# Altium PCB WE_1100R3.PcbDoc
Units mm, origin at the board's own origin, x right, y up, seen from the top; angles counter-clockwise.
Board outline 39.6 x 20 mm, 4 copper layers (Top Side, Ref Ground TS, Ref Ground BS, Bottom Side), stack 0.736 mm thick; 21 components, 29 nets, 127 pads, 112 vias.
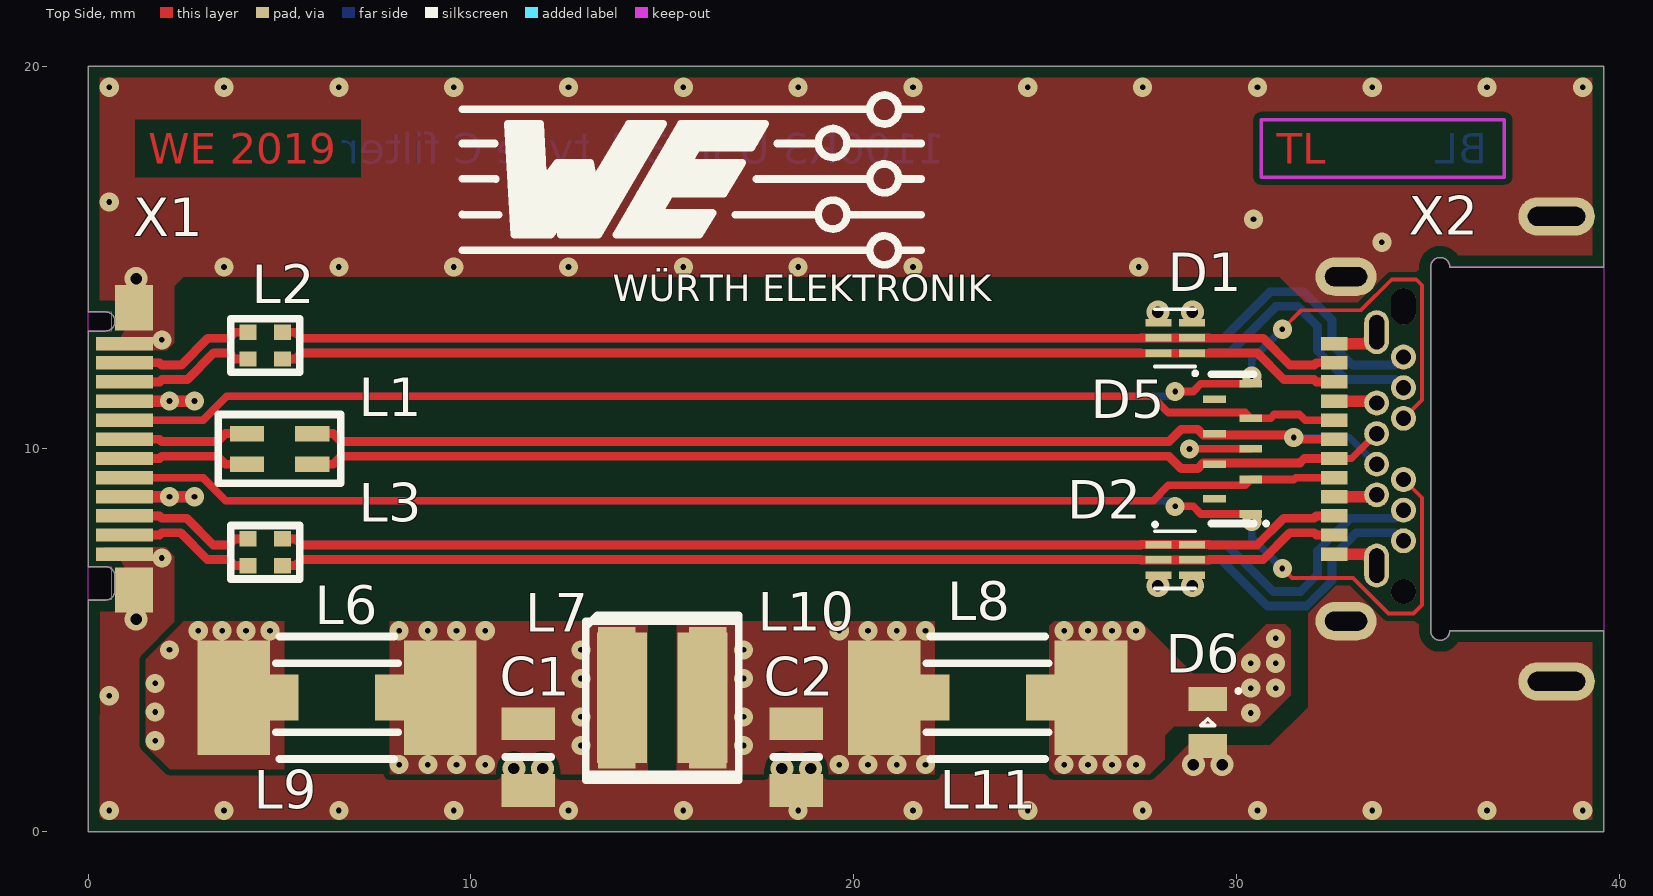
[diagram p0: Top Side view]
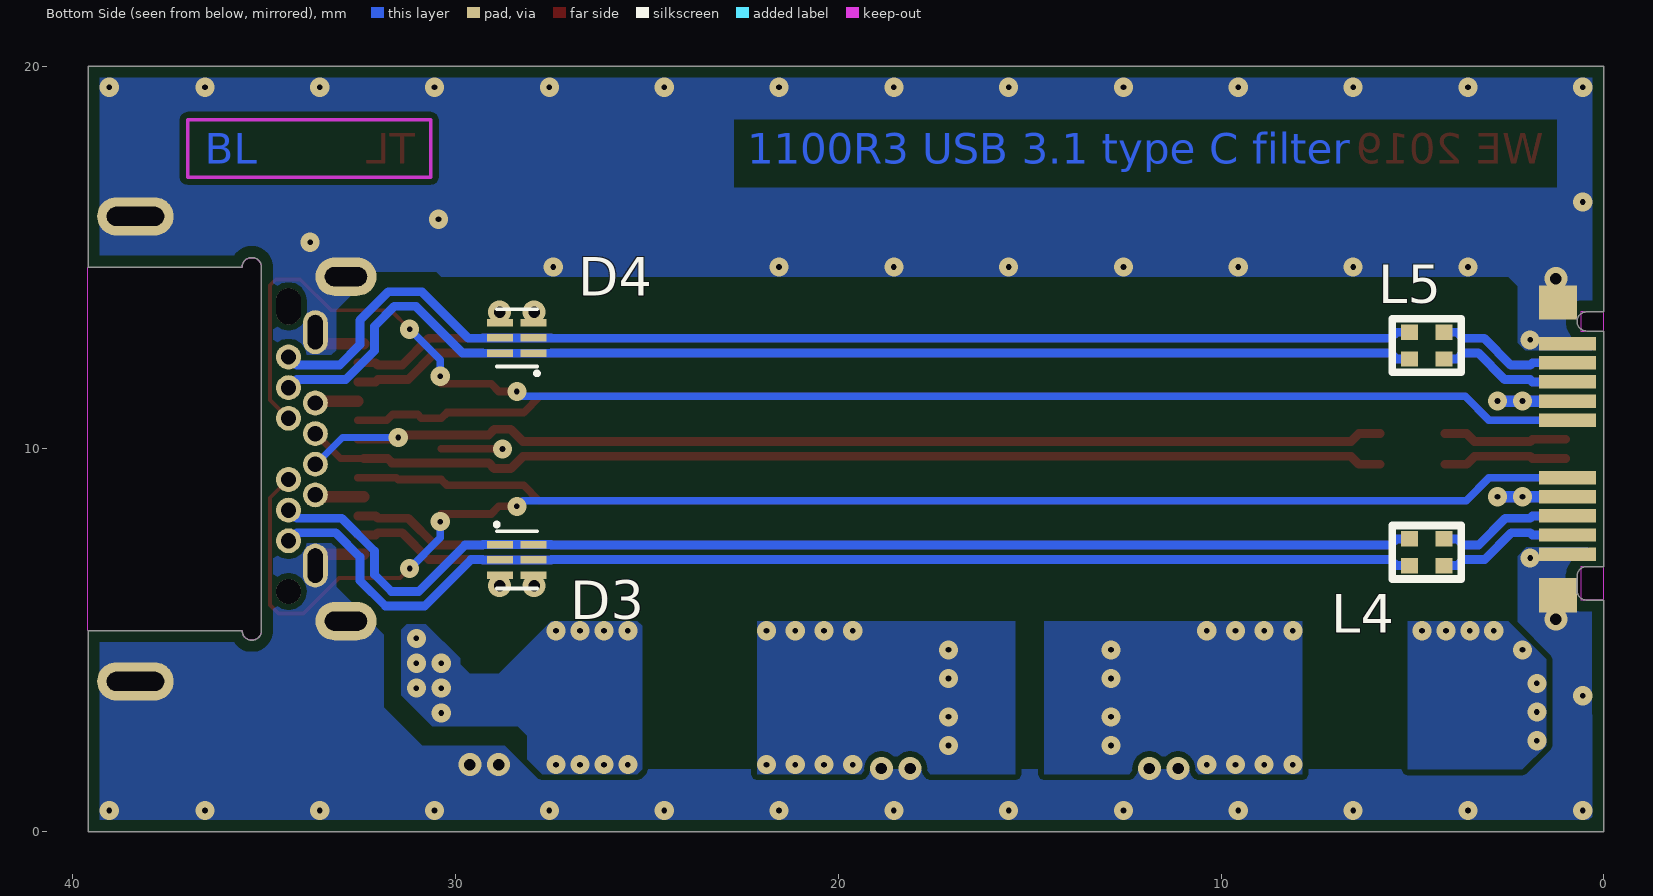
[diagram p1: Bottom Side view, seen from below]
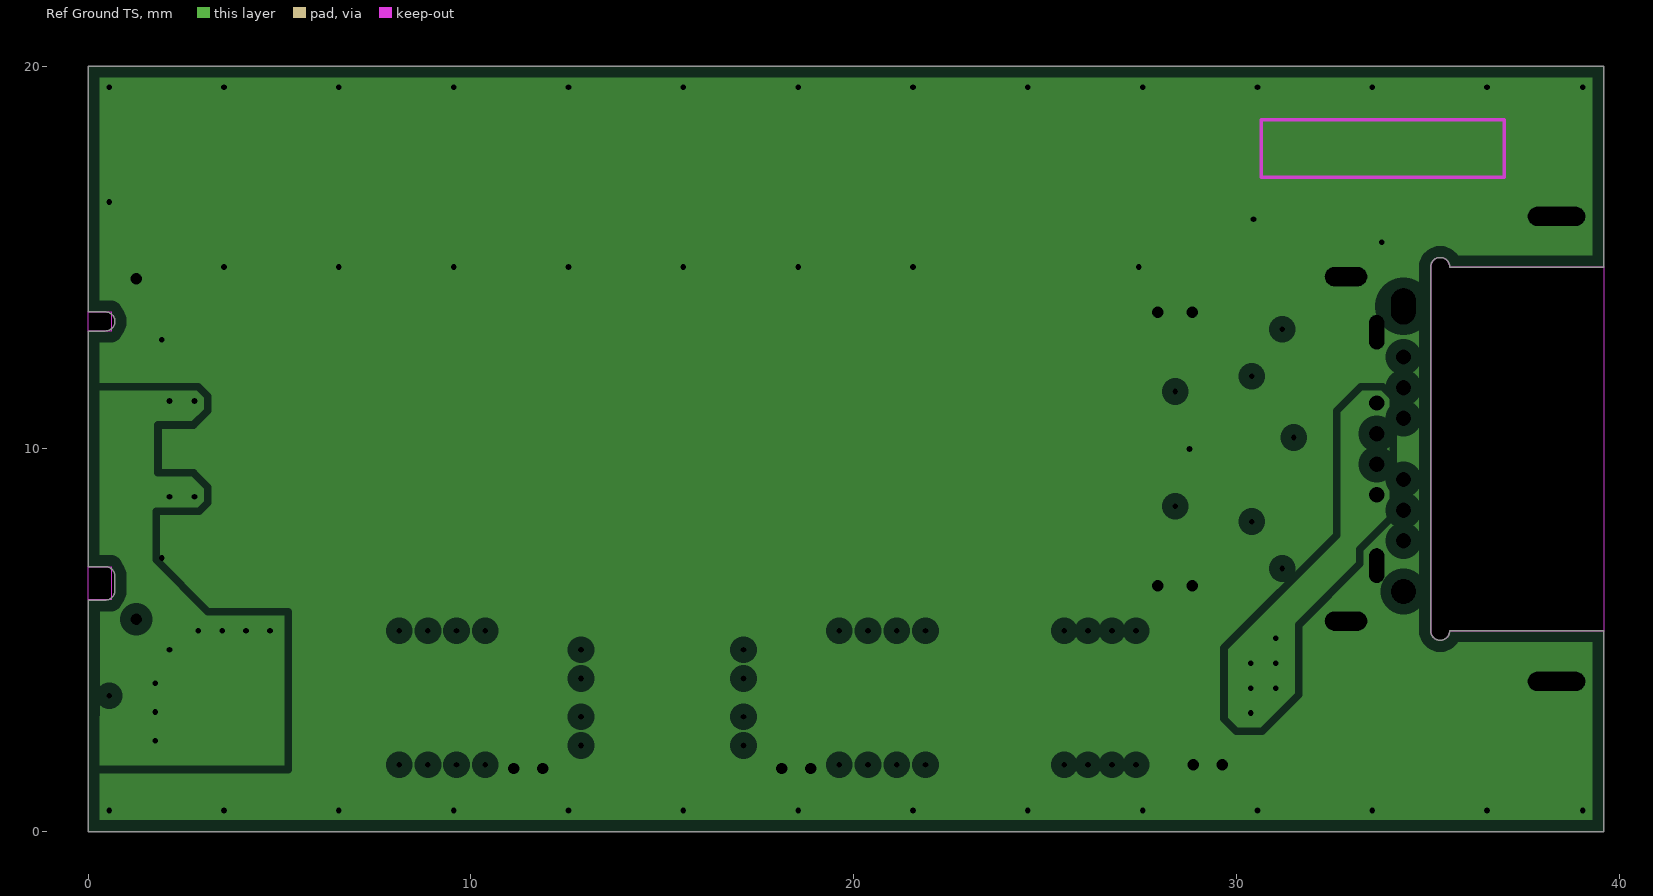
[diagram p2: Ref Ground TS, clearances drawn from the general rule]
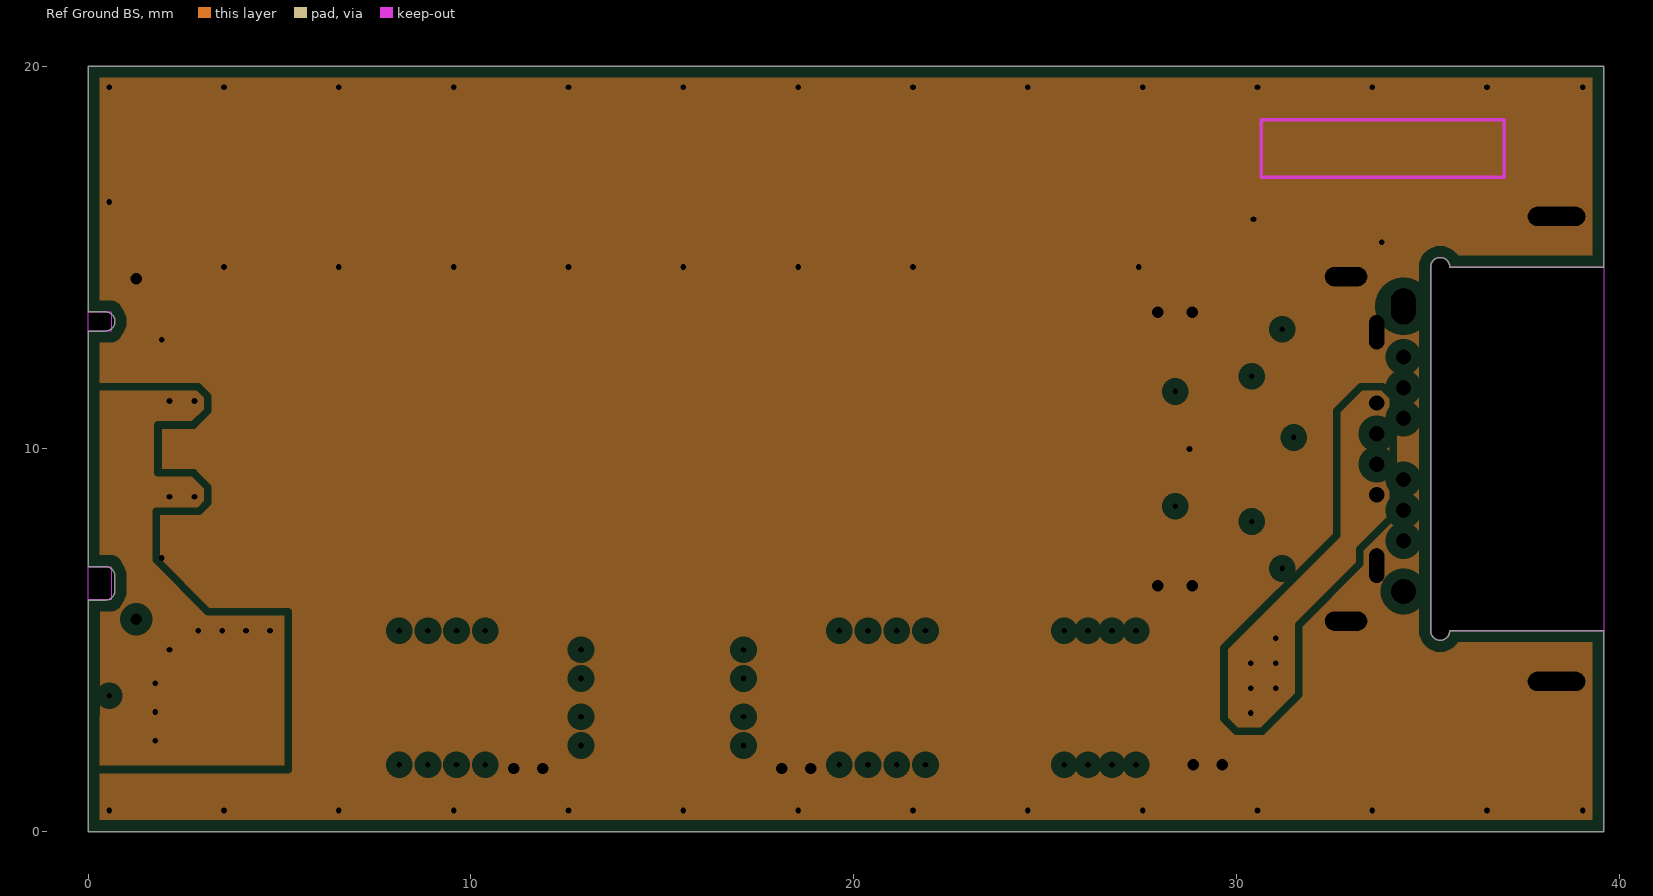
[diagram p3: Ref Ground BS, clearances drawn from the general rule]
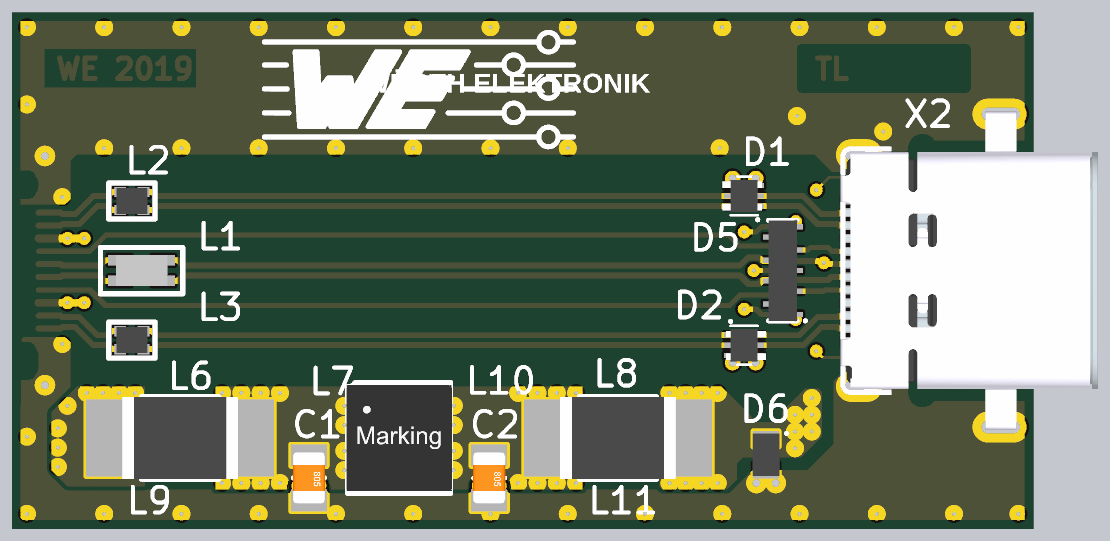
[diagram p4: 3D render of the assembled board from above, using the file's embedded part models]
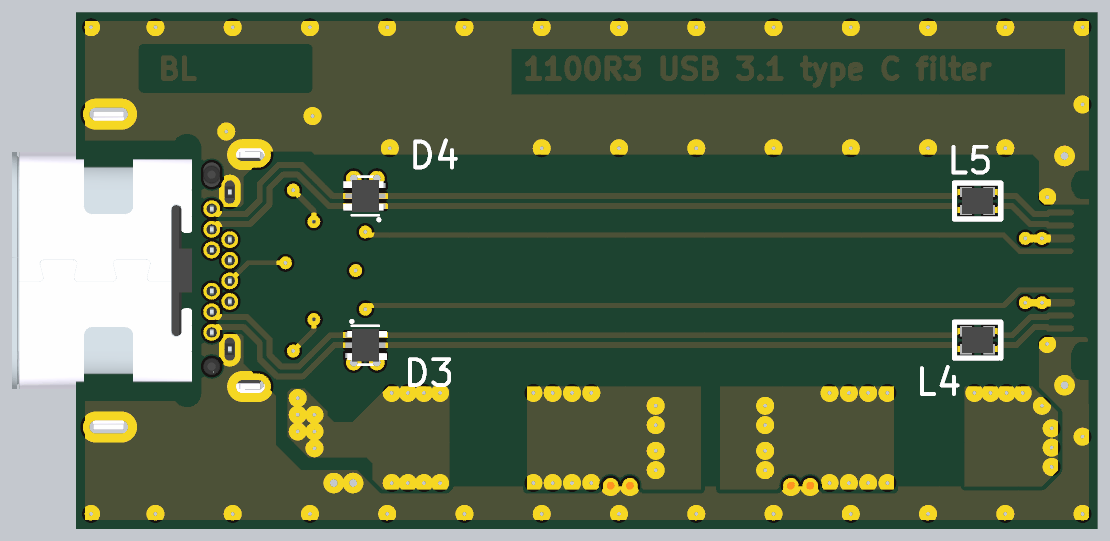
[diagram p5: 3D render of the assembled board from below, using the file's embedded part models]

## Layer stack, top to bottom
Top Solder: solder mask 0.03, Solder Resist, Dk 3.5
Top Side: signal copper 0.04
Dielectric 1: prepreg 0.17, FR-4 1080 2116 TG135, Dk 4
Ref Ground TS: plane copper 0.033, net (Multiple Nets)
Dielectric 3: core 0.25, FR-4, Dk 4.1
Ref Ground BS: plane copper 0.033, net (Multiple Nets)
Dielectric 4: prepreg 0.17, FR-4 1080 2116 TG135, Dk 4
Bottom Side: signal copper 0.04
Bottom Solder: solder mask 0.03, Solder Resist, Dk 3.5

## Board outline
0.005,6.05 0.45,6.05 ccw(c0.45,6.3) 0.7,6.3 0.7,6.675 ccw(c0.45,6.675) 0.45,6.925 0,6.925 0,13.08 0.45,13.08 ccw(c0.45,13.33) 0.45,13.58 0,13.58 0,20 39.6,20 39.6,14.75 35.576,14.75 ccw(c35.325,14.75) 35.074,14.75 35.075,14.75 35.075,5.25 ccw(c35.325,5.25) 35.575,5.25 39.6,5.25 39.6,0 0,0

## Design rules (kind name [scope] priority, off if disabled: settings)
BoardOutlineClearance [All] p1: gap=0.3 ignorepadtopadclearanceinfootprint=FALSE except(0.1: Track-CutoutEdge)
Clearance Clearance-xPP-xTP-xTT [All] p1: gap=0.15 ignorepadtopadclearanceinfootprint=FALSE except(0: Arc-Hole Track-Hole SMDPad-Hole THPad-Hole Via-Hole Fill-Hole Poly-Hole Region-Hole Text-Hole; 0.1: Track-Track Track-SMDPad Track-THPad Track-Via Track-Text SMDPad-Poly SMDPad-Region THPad-THPad)
ComponentClearance FilterClearance [InComponentClass('Filter') vs InComponentClass('Filter')] p1: gap=0 collisioncheckmode=3 verticalgap=0 showdistances=FALSE
ComponentClearance [All] p2: gap=0.25 collisioncheckmode=3 verticalgap=0.25 showdistances=FALSE
DiffPairsRouting [All] p1: maxlimit=0.25 minlimit=0.15 mostfreqgap=0.15 toplayer_minwidth=0.15 toplayer_maxwidth=0.3 toplayer_prefwidth=0.23 bottomlayer_minwidth=0.15 bottomlayer_maxwidth=0.3 bottomlayer_prefwidth=0.23 maxuncoupledlength=12.5
Height [All] p1: minheight=0 maxheight=25 prefheight=12.5
HoleSize HoleSize-PTH [All] p1: absolutevalues=TRUE maxlimit=2 minlimit=0.1 maxpercent=80.000 minpercent=20.000
HoleToHoleClearance [All] p1: gap=0.15 allowstackedmicrovias=TRUE
MinimumAnnularRing "Minimum IAR  >0.45mm" [((ObjectKind = 'Pad') OR (ObjectKind = 'Via')) And (Layer = 'MultiLayer') And (HoleDiameter > AsMM(0.45))] p1: minimumring=0.1 // minimum inner annular ring for pads > 0.45mm finished hole size
MinimumAnnularRing "Minimum IAR <=0.45mm" [((ObjectKind = 'Pad') OR (ObjectKind = 'Via')) And (Layer = 'MultiLayer') And (HoleDiameter <= AsMM(0.45))] p2: minimumring=0.1 // minimum inner annular ring for pads <= 0.45mm finished hole size
MinimumSolderMaskSliver [All] p1 off: minsoldermaskwidth=0.1
PlaneClearance PlaneClearance-IPI [All] p1: clearance=0.275
PlaneConnect [All] p1: planeconnectstyle=Direct reliefexpansion=0.4 reliefentries=4 reliefconductorwidth=0.2 reliefairgap=0.2
PolygonConnect PolygonConnect-xTW [All] p1: connectstyle=Direct reliefconductorwidth=0.2 reliefentries=4 polygonreliefangle="90 Angle" airgapwidth=0.254
RoomDefinition WE_1100_top [InComponentClass('WE_1100_top')] p1: confinementstyle=ConfineIn formatcopy=TRUE lockcomponents=FALSE outline -12.3,-0.4 44.575,-0.4 44.575,20.4 -12.3,20.4
RoutingCorners [All] p1: cornerstyle=45-Degree minsetback=2.5 maxsetback=2.5
RoutingVias "RoutingVias > 0.45mm" [(ObjectKind = 'Via') And (HoleDiameter > AsMM(0.45))] p1: holewidth=0.15 width=0.5 viastyle="Through Hole" minholewidth=0.1 minwidth=0.45 maxholewidth=0.25 maxwidth=0.6 // finishet hole size > 0.45mm
RoutingVias "RoutingVias <= 0.45mm" [(ObjectKind = 'Via') And (HoleDiameter <= AsMM(0.45))] p2: holewidth=0.15 width=0.5 viastyle="Through Hole" minholewidth=0.1 minwidth=0.45 maxholewidth=0.25 maxwidth=0.6 // finishet hole size <= 0.45mm
SilkToSilkClearance [All] p1 off: silktosilkclearance=0.2
SilkToSolderMaskClearance SilkscreenOverComponentPads [IsPad] p1 off: minsilkscreentomaskgap=0.1 clearancetoexposedcopper=FALSE
SolderMaskExpansion [All] p1: expansion=0.1
UnpouredPolygon [All] p1: allowshelved=TRUE
Width Width-xTW [All] p1: maxlimit=1.5 minlimit=0.1 preferedwidth=0.2
18 further rules are at their usual default settings.

## Classes and differential pairs
differential pair SSTX2H: +SSTX2H_P -SSTX2H_N
differential pair SSTX2D: +SSTX2D_P -SSTX2D_N
differential pair SSTX1H: +SSTX1H_P -SSTX1H_N
differential pair SSTX1D: +SSTX1D_P -SSTX1D_N
differential pair SSRX2H: +SSRX2H_P -SSRX2H_N
differential pair SSRX2D: +SSRX2D_P -SSRX2D_N
differential pair SSRX1H: +SSRX1H_P -SSRX1H_N
differential pair SSRX1D: +SSRX1D_P -SSRX1D_N
differential pair D1D: +D1D_P -D1D_N
differential pair D1H: +D1H_P -D1H_N

## Components (designator, comment, footprint, x,y, rotation, side; value= is the part's Value field where it differs from the comment)
C1 "4u7F/25V" "C0805 (reflow)" 11.5,1.95 r270 top value=4.7u
C2 "4u7F/25V" "C0805 (reflow)" 18.5,1.95 r270 top value=4.7u
D1 "WE-TVS-super-speed" DFN88P100X50-6L 28.4,12.9 r180 top
D2 "WE-TVS-super-speed" DFN88P100X50-6L 28.4,7.1 r0 top
D3 "WE-TVS-super-speed" DFN88P100X50-6L 28.4,7.1 r180 bottom
D4 "WE-TVS-super-speed" DFN88P100X50-6L 28.4,12.9 r0 bottom
D5 "WE-TVS-super-speed" DFN90P380X55-9L 29.9,10 r90 top
D6 "WE-TVS-Standard" DFN110P160X55-2L 29.25,2.85 r270 top
L1 "90R/0.37A" "WE-CNSW-0805 (REFLOW)" 5,10 r0 top value=90R
L2 "60R/0.6A" "WE-CNSW-HF-0504 (REFLOW)" 4.625,12.7 r0 top value=60R
L3 "60R/0.6A" "WE-CNSW-HF-0504 (REFLOW)" 4.625,7.3 r0 top value=60R
L4 "60R/0.6A" "WE-CNSW-HF-0504 (REFLOW)" 4.625,7.3 r0 bottom value=60R
L5 "60R/0.6A" "WE-CNSW-HF-0504 (REFLOW)" 4.625,12.7 r0 bottom value=60R
L6 "100R/8000mA" WE-MPSB_1812 6.5,3.5 r0 top value=100R
L7 "1.2uH" WE-MAPI_4020 15,3.5 r0 top value=1u2
L8 "100R/8000mA" WE-MPSB_1812 23.5,3.5 r0 top value=100R
L9 "110R/5400mA" WE-MPSB_1206 6.5,3.5 r0 top value=110R
L10 "1.2uH" WE-MAPI_3020 15,3.5 r0 top value=1u2
L11 "110R/5400mA" WE-MPSB_1206 23.5,3.5 r0 top value=110R
X1 "USB 3.1 C 0.8" 632712000011 -5.85,10 r270 top
X2 "BU-24 USB 3.1 C1.6 mid mount" 632723130112 37.125,10 r90 top value="mid mount"

## Footprints (in the part's own frame and the unit in brackets; to place one, negate y for a bottom-side part, rotate by r counter-clockwise, add the part's x,y. Pads: shape width x height; smd on the part's side, far side on the other; paste and mask are expansions set on the pad)
632712000011 [mm] "USB 3.1 Type C Plug Horizontal SMT"
  rect 0.35x1.5 smd: A1(2.75,6.8) A2(2.25,6.8) A3(1.75,6.8) A4(1.25,6.8) A5(0.75,6.8) A6(0.25,6.8) A7(-0.25,6.8) A8(-0.75,6.8) A9(-1.25,6.8) A10(-1.75,6.8) A11(-2.25,6.8) A12(-2.75,6.8)
  rect 0.35x1.5 smd far side: B1(-2.75,6.8) B2(-2.25,6.8) B3(-1.75,6.8) B4(-1.25,6.8) B5(-0.75,6.8) B8(0.75,6.8) B9(1.25,6.8) B10(1.75,6.8) B11(2.25,6.8) B12(2.75,6.8)
  rect 0.9x1 smd far side: Shell(-3.825,7.05) Shell(3.825,7.05)
  rect 1.18x1 smd: Shell(-3.69,7.05) Shell(3.69,7.05)
  Keep-Out Layer board cut-out: -3.58,5.85 -3.58,6.45 -3.08,6.45 -3.08,5.85
  Keep-Out Layer board cut-out: 3.075,5.85 3.075,6.45 3.945,6.45 3.945,5.85
  body extent -5.13,-5.92 5.12,7.48, height 1.74
632723130112 [mm] "USB_Type C 3.1_Mid-Mount_THR/SMT_1,6mm"
  rect 0.35x0.7 smd: A1(-2.75,4.57) A2(-2.25,4.57) A3(-1.75,4.57) A4(-1.25,4.57) A5(-0.75,4.57) A6(-0.25,4.57) A7(0.25,4.57) A8(0.75,4.57) A9(1.25,4.57) A10(1.75,4.57) A11(2.25,4.57) A12(2.75,4.57)
  oval 1.15x0.65 hole 0.4 slot 0.9 at 0 deg: B1(3.05,3.46) B12(-3.05,3.46)
  round 0.65 hole 0.4: B2(2.4,2.76) B3(1.6,2.76) B4(1.2,3.46) B5(0.8,2.76) B6(0.4,3.46) B7(-0.4,3.46) B8(-0.8,2.76) B9(-1.2,3.46) B10(-1.6,2.76) B11(-2.4,2.76)
  round 0.65 hole 0.65 unplated: M1(-3.725,2.76)
  oval 0.95x0.65 hole 0.65 slot 0.95 at 0 deg unplated: M2(3.725,2.76)
  oval 1x2 hole 0.5 slot 1.5 at 90 deg: Shell(-6.075,-1.24) Shell(6.075,-1.24)
  oval 1x1.6 hole 0.5 slot 1.1 at 90 deg: Shell(-4.5,4.26) Shell(4.5,4.26)
  Keep-Out Layer board cut-out: -4.75,-2.49 4.75,-2.49 4.75,1.55 4.858,1.575 4.945,1.644 4.994,1.744 4.994,1.856 4.945,1.956 4.858,2.025 4.75,2.05 4.75,2.05 -4.75,2.05 -4.858,2.025 -4.945,1.956 -4.994,1.856 -4.994,1.744 -4.945,1.644 -4.858,1.575 -4.75,1.55 -4.75,1.55
  body extent -6.18,-5 6.18,4.99, height 2.04
"C0805 (reflow)" [mm] "Multilayer Ceramic Chip Capacitors"
  rect 0.85x1.4 smd: 1(-0.875,0) 2(0.875,0)
  silkscreen extent 0,-0.6 0,0.6, body extent -1,-0.63 1,0.63, height 0.78
DFN88P100X50-6L [mm] "DFN, 6-Leads, Body 1,20x1,00mm, Pitch 0,875mm, IPC High Density"
  rect 0.675x0.2 smd: 1(-0.437,0.4) 2(-0.437,0) 3(-0.437,-0.4) 4(0.437,-0.4) 5(0.437,0) 6(0.437,0.4)
  silkscreen extent -0.58,-0.75 0.53,0.97, body extent -0.7,-0.62 0.85,0.63, height 0.5
DFN90P380X55-9L [mm] "DFN, 9-Leads, Body 1,00x3,80mm, Pitch 0,9mm, IPC High Density"
  rect 0.2x0.6 smd: 1(-1.7,-0.475) 2(-0.8,-0.475) 3(0,-0.475) 4(0.8,-0.475) 5(1.7,-0.475) 6(1.3,0.475) 7(0.4,0.475) 8(-0.4,0.475) 9(-1.3,0.475)
  silkscreen extent -2,-0.92 1.95,0.55, body extent -1.95,-0.55 1.95,0.55, height 0.55
DFN110P160X55-2L [mm] "DFN, 2-Leads, Body 1,00x1,60mm, Pitch 1,10mm, IPC High Density"
  rect 0.625x1 smd: 1(-0.612,0) 2(0.612,0)
  silkscreen extent -0.87,-0.18 0.08,0.85, body extent -0.82,-0.53 0.82,0.53, height 0.55
"WE-CNSW-0805 (REFLOW)" [mm] "SMD Inductor, 4-Leads, Body 1,4x2,2mm"
  rect 0.9x0.4 smd: 1(-0.85,0.4) 2(0.85,0.4) 3(-0.85,-0.4) 4(0.85,-0.4)
  silkscreen extent -1.6,-0.9 1.6,0.9, body extent -1,-0.6 1,0.6, height 1.18
"WE-CNSW-HF-0504 (REFLOW)" [mm] "SMD Inductor, 4-Leads, Body 1.0x1.2mm"
  rect 0.45x0.4 smd: 1(-0.45,0.35) 2(0.45,0.35) 3(-0.45,-0.35) 4(0.45,-0.35)
  silkscreen extent -0.9,-0.7 0.9,0.7, body extent -0.6,-0.5 0.6,0.5, height 0.89
WE-MAPI_3020 [mm] "SMD Shielded Power Inductor, 2-Leads, body 3.0x3.0"
  rect 1.3x3.4 smd: 1(-1.05,0) 2(1.05,0)
  silkscreen extent -2,-2 2,2, body extent -1.5,-1.5 1.5,1.5, height 2.01
WE-MAPI_4020 [mm] "SMD Shielded Power Inductor, 2-Leads, body 4.1x4.1"
  rect 0.98x3.7 smd: 1(-1.185,0) 2(1.185,0)
  silkscreen extent -2,-2.15 2,2.15, body extent -2.05,-2.05 2.05,2.05, height 2.11
WE-MPSB_1206 [mm] "SMD EMI Multilayer Power Suppression Bead, body 3.2x1.6"
  rect 1.6x1.2 smd: 1(-1.8,0) 2(1.8,0)
  silkscreen extent -1.6,-0.9 1.6,0.9, body extent -1.6,-0.8 1.6,0.8, height 1.11
WE-MPSB_1812 [mm] "SMD EMI Multilayer Power Suppression Bead, body 4.5x3.2"
  rect 1.9x3 smd: 1(-2.7,0) 2(2.7,0)
  silkscreen extent -1.5,-1.6 1.5,1.6, body extent -2.25,-1.6 2.25,1.6, height 2.31

## Part data
C1 C2: library part 4UF7/25-X5R-0805, "Ceramic SMT X5R 4,7uF/25V 0805", Case=C0805, Dielectric=X5R, Manufacturer=WE, Temperature="-55°C - +85°C", Tolerance=20%, Voltage=25V, Art.-Code=885012107018, ComponentLink1Description=Datasheet, ComponentLink1URL=http://katalog.we-online.de/pbs/datasheet/885012107018.pdf, Group=C-KERKO, HelpURL=d:\Hardware\Datasheet\Kondensatoren\WCAP-CSGP\885012107018.pdf, Obligation=no, Part-No.=X5R0805475M025DFCT10000, TK=15%, Type=WCAP-CSGP, Value1=4u7F/25V
D1 D2 D3 D4: library part WE-TVS-ULC-DFN1012-6, "TVS, diode, array, 2 channel ESD protection, 3.3V, DFN1012-6", Case=DFN1012, Manufacturer=WE, Voltage=3.3V, Art.-Code=824012823, Group=D-DIODE, HelpURL=d:\Hardware\Datasheet\Diode\WE_824xx_TVS_AZ1023-02F_Preliminary.pdf, MSL=3, Obligation=no, Part-No.=824012823, Preferred Device=no, Type="TVS Diode", Value1=WE-TVS-super-speed
D5: library part WE-TVS-ULC-DFN3810, "TVS, diode, array, 8 channel ESD protection, 1.2V, DFN3810-9", Case=DFN3810, Manufacturer=WE, Voltage=1.2V, Art.-Code=824014885, Group=D-DIODE, HelpURL=d:\Hardware\Datasheet\Diode\WE_824xx_TVS_AZ124S-08F_Preliminary.pdf, MSL=3, Obligation=no, Part-No.=824014885, Preferred Device=no, Type="TVS Diode", Value1=WE-TVS-super-speed
D6: library part WE-TVS20-ULC-DFN1610, "TVS, diode, unidir, ESD protection, 20V, DFN1610", Case=DFN1610, Manufacturer=WE, Voltage=20V, Art.-Code=824045810, ComponentLink1Description=Datasheet, ComponentLink1URL=http://katalog.we-online.de/pbs/datasheet/824045810.pdf, Group=D-DIODE, HelpURL=d:\Hardware\Datasheet\Diode\WE_824xx_TVS_AZ4520-01F_Datasheet.pdf, MSL=3, Obligation=no, Part-No.=824045810, Preferred Device=no, Type="TVS Diode", Value1=WE-TVS-Standard
L1: library part Z90R-370mA-WE-CNSW, "Common mode line filter SMD WE-CNSW (USB, LVDS)", Case=C0805, Current=370mA, Manufacturer=WE, Temperature="-40°C - +125°C", Tolerance=25%, Voltage=50VDC, Art.-Code=744231091, Group=L-SPULE, HelpURL=d:\Hardware\Datasheet\Induktivitäten\WE-CNSW\744231091.pdf, MSL=1, Obligation=no, Part-No.=744231091, Type="WE-CNSW 0805", Value1=90R/0.37A
L2 L3 L4 L5: library part "Z60R-600mA-WE-CNSW HF", "Common mode line filter SMD WE-CNSW HF (USB3.0)", Case=C0504, Current=600mA, Manufacturer=WE, Temperature="-40°C - +105°C", Tolerance=25%, Voltage=20VDC, Art.-Code=7442335600, ComponentLink1URL=http://katalog.we-online.de/pbs/datasheet/7442335600.pdf, Group=L-SPULE, HelpURL=d:\Hardware\Datasheet\Induktivitäten\WE-CNSW_HF\7442335600.pdf, MSL=1, Obligation=no, Part-No.=7442335600, Type="WE-CNSW HF 0504", Value1=60R/0.6A
L6 L8: library part Z100R_8000mA_1812_MPSB, "Multilayer Power Suppression Bead 1812 100R at 100MHz/0.006R", Case=C1812, Current=8000mA, Manufacturer=WE, Temperature="-55°C - +125°C", Tolerance=25%, Voltage=80VDC, Art.-Code=74279226101, ComponentLink1Description=Datasheet, ComponentLink1URL=https://katalog.we-online.de/pbs/datasheet/74279226101.pdf, Group=L-FERRIT, HelpURL=d:\Hardware\Datasheet\Induktivitäten\Ferrit\74279226101.pdf, Obligation=no, Part-No.=74279226101, Type=WE-MPSB, Value1=100R/8000mA
L7: library part "1UH2-5.8A-SMD-WE-MAPI 4020", "Inductor SMT WE-MAPI 4020 1.2uH/5800mA", Case="SMD 4020", Current=5.8A, Manufacturer=WE, Temperature="-40°C - +125°C", Tolerance=20%, Voltage=80VDC, Art.-Code=74438356012, ComponentLink1Description=Datasheet, ComponentLink1URL=https://katalog.we-online.de/pbs/datasheet/74438356012.pdf, Group=L-SPULE, HelpURL=d:\Hardware\Datasheet\Induktivitäten\WE-MAPI\74438356012.pdf, MSL=1, Obligation=no, Part-No.=74438356012, Type="WE-MAPI 4020", Value1=1.2uH
L9 L11: library part Z110R_5400mA_1206_MPSB, "Multilayer Power Suppression Bead 1206 110R at 100MHz/0.0095R", Case=C1206, Current=5400mA, Manufacturer=WE, Temperature="-55°C - +125°C", Tolerance=25%, Voltage=80VDC, Art.-Code=74279221111, ComponentLink1Description=Datasheet, ComponentLink1URL=https://katalog.we-online.de/pbs/datasheet/74279221111.pdf, Group=L-FERRIT, HelpURL=d:\Hardware\Datasheet\Induktivitäten\Ferrit\74279221111.pdf, Obligation=no, Part-No.=74279221111, Type=WE-MPSB, Value1=110R/5400mA
L10: library part "1UH2-3.9A-SMD-WE-MAPI 3020", "Inductor SMT WE-MAPI 3020 1.2uH/3900mA", Case="SMD 3020", Current=3.9A, Manufacturer=WE, Temperature="-40°C - +125°C", Tolerance=20%, Voltage=80VDC, Art.-Code=74438336012, ComponentLink1Description=Datasheet, ComponentLink1URL=https://katalog.we-online.de/pbs/datasheet/74438336012.pdf, Group=L-SPULE, HelpURL=d:\Hardware\Datasheet\Induktivitäten\WE-MAPI\74438336012.pdf, Obligation=no, Part-No.=74438336012, Type="WE-MAPI 3020", Value1=1.2uH
X1: library part "ST-24 USB 3.1 C 0.8", "male USB 3.1 Type C 24 pins 90° THT & SMT LP 0.8", Case="USB C", Current=5A, Manufacturer=WE, Temperature="-25°C - +105°C", Voltage=20V, Art.-Code=632712000011, ComponentLink1Description=Datasheet, ComponentLink1URL=http://katalog.we-online.de/em/datasheet/632712000011.pdf, Group=X-STECKER, HelpURL=d:\Hardware\Datasheet\Steckverbinder\we_632712000011_USB_3.1_male_Type_C_LP0.8.pdf, Part-No.=632712000011, Type="USB C male", UL File=E323964, Value1="USB 3.1 C 0.8"
X2: "USB 3.1 Type C Receptacle WR-COM, Horizontal, THR / SMT", Case=USB-C, Current=5A, Manufacturer=WE, Temperature="-40°C - +85°C", Value1="USB 3.1 C 1.6", Voltage=20V, Art.-Code=632723130112, ComponentLink1Description=Datasheet, ComponentLink1URL=https://katalog.we-online.de/em/datasheet/632723130112.pdf, Group=X-BUCHSE, HelpURL=d:\Hardware\Datasheet\Steckverbinder\we_632723130112_USB_3.1_female_Type_C_LP1.6.pdf, Obligation=yes, Part-No.=632723130112, Type="USB C female"

## Via types
v1: diameter 0.5, hole 0.15, Top Side to Bottom Side, 100 vias
v2: diameter 0.6, hole 0.3, Top Side to Bottom Side, 12 vias

## Nets (pads, with @x,y where several pads share a name; then routed paths per layer and width w, separated by ;. In a path a pad name is that pad's centre, name@x,y a point inside that pad or via, vN(x,y) a via of type N, cw(c..) or ccw(c..) an arc to the next point about the centre after c; other vN are vias at no path point)
CC1: D5.2 X1.A5 X2.A5 | length 32.1
  Top Side w0.2: X1.A5@1,9.25 3,9.25 3.6,8.65 27.825,8.65 28.225,9.05 30.225,9.05 D5.2 31.5,9.2 31.55,9.25 X2.A5
CC2: D5.5 X1.B5 X2.B5 | length 39.5
  Top Side w0.1: v1(31.2,13.125) 31.7,13.625 33.26,13.625 34.06,14.425 34.7,14.425 34.85,14.275 34.85,11.277 X2.B5@34.369,10.796
  Top Side w0.2: v1(28.4,11.5) 28.871,11.5 29.071,11.7 D5.5 ; X2.B5@34.36,10.8 X2.B5@34.36,11.025
  Bottom Side w0.2: X1.B5@1,10.75 3,10.75 3.625,11.375 28.275,11.375 v1(28.4,11.5) ; v1(30.4,11.9) 30.4,12.325 v1(31.2,13.125)
D1D_N: D5.7 L1.2 X2.A7 X2.B7 | length 29.5
  Top Side w0.23: L1.2 6.4,10.4 6.61,10.19 ; 6.6,10.19 28.237,10.19 28.562,10.515 28.988,10.515 29.138,10.365 v1@31.5,10.365 ; v1@31.5,10.25 X2.A7
  Bottom Side w0.18: v1(31.5,10.3) 32.96,10.3 X2.B7@33.662,9.598
D1D_P: D5.8 L1.4 X2.A6 X2.B6 | length 28.4
  Top Side w0.18: X2.A6@32.4,9.75 X2.A6 33.01,9.75 X2.B6@33.66,10.4
  Top Side w0.23: L1.4 6.4,9.6 6.61,9.81 ; 6.6,9.81 6.61,9.81 ; X2.A6@32.4,9.75 31.775,9.75 31.66,9.635 29.138,9.635 28.988,9.485 28.562,9.485 28.237,9.81 6.61,9.81
D1H_N: L1.1 X1.A7 | length 3.3
  Top Side w0.23: X1.A7@1,10.25 1.865,10.25 1.925,10.19 3.375,10.19 3.585,10.4 L1.1
D1H_P: L1.3 X1.A6 | length 3.3
  Top Side w0.23: X1.A6@1,9.75 1.865,9.75 1.925,9.81 3.375,9.81 3.585,9.6 L1.3
GND: C1.2 C2.2 D1.3 D1.4 D2.3 D2.4 D3.3 D3.4 D4.3 D4.4 D5.3 D6.2 X1.A1 X1.A12 X1.B1 X1.B12 X1.Shell X2.A1 X2.A12 X2.B1 X2.B12 X2.Shell | length 4.4
  Top Side w0.2: v1(28.775,10) D5.3
  Top Side w0.3: X2.A1@32.4,7.25 X2.A1 33.365,7.25 X2.B12 ; X2.A12@32.4,12.75 X2.A12 33.365,12.75 X2.B1
  other v1: 0.55,0.55 3.55,0.55 6.55,0.55 9.55,0.55 12.55,0.55 15.55,0.55 18.55,0.55 21.55,0.55 24.55,0.55 27.55,0.55 30.55,0.55 33.55,0.55 36.55,0.55 39.05,0.55 0.55,3.55 1.925,7.15 1.925,12.85 3.55,14.75 6.55,14.75 9.55,14.75 12.55,14.75 15.55,14.75 18.55,14.75 21.55,14.75 27.45,14.75 33.8,15.4 30.45,16 0.55,16.45 0.55,19.45 3.55,19.45 6.55,19.45 9.55,19.45 12.55,19.45 15.55,19.45 18.55,19.45 21.55,19.45 24.55,19.45 27.55,19.45 30.55,19.45 33.55,19.45 36.55,19.45 39.05,19.45
  other v2: 11.125,1.65 11.875,1.65 18.125,1.65 18.875,1.65 28.875,1.75 29.625,1.75 1.25,5.55 27.95,6.425 28.85,6.425 27.95,13.575 28.85,13.575 1.25,14.45
NetC1_1: C1.1 L6.2 L7.1 L9.2 L10.1
  other v1: 8.125,1.75 8.875,1.75 9.625,1.75 10.375,1.75 12.875,2.25 12.875,3 12.875,4 12.875,4.75 8.125,5.25 8.875,5.25 9.625,5.25 10.375,5.25
NetC2_1: C2.1 L7.2 L8.1 L10.2 L11.1
  other v1: 19.625,1.75 20.375,1.75 21.125,1.75 21.875,1.75 17.125,2.25 17.125,3 17.125,4 17.125,4.75 19.625,5.25 20.375,5.25 21.125,5.25 21.875,5.25
SBU1: D5.4 X1.A8 X2.A8 | length 32.2
  Top Side w0.2: X1.A8@1,10.75 3,10.75 3.625,11.375 27.8,11.375 28.225,10.95 30.225,10.95 D5.4 30.893,10.8 30.993,10.9 31.646,10.9 31.796,10.75 X2.A8
SBU2: D5.1 X1.B8 X2.B8 | length 39.3
  Top Side w0.1: v1(31.2,6.875) 31.45,6.625 33.05,6.625 33.975,5.7 34.625,5.7 34.85,5.925 34.85,8.723 X2.B8@34.369,9.204
  Top Side w0.2: v1(28.4,8.5) 28.871,8.5 29.071,8.3 D5.1 ; X2.B8@34.36,8.975 X2.B8@34.36,9.2
  Bottom Side w0.2: X1.B8@1,9.25 3,9.25 3.6,8.65 28.25,8.65 v1(28.4,8.5) ; v1(30.4,8.1) 30.4,7.675 v1(31.2,6.875)
SSRX1D_N: D3.1 D3.6 L4.4 X2.B10 | length 31.1
  Bottom Side w0.23: L4.4 5.415,7.65 5.575,7.49 27.5,7.49 27.51,7.5 D3.6 D3.1 29.29,7.5 29.3,7.49 29.752,7.49 30.967,6.275 31.675,6.275 32.12,6.72 32.12,7.332 32.978,8.19 34.15,8.19 X2.B10@34.36,8.4
SSRX1D_P: D3.2 D3.5 L4.2 X2.B11 | length 31.1
  Bottom Side w0.23: L4.2 5.415,6.95 5.575,7.11 27.5,7.11 27.51,7.1 D3.5 D3.2 29.29,7.1 29.3,7.11 29.595,7.11 30.81,5.895 31.832,5.895 32.5,6.563 32.5,7.175 33.135,7.81 34.15,7.81 X2.B11@34.36,7.6
SSRX1H_N: L4.3 X1.B10 | length 3.6
  Bottom Side w0.23: X1.B10@1,8.25 1.865,8.25 1.925,8.19 2.572,8.19 3.272,7.49 3.675,7.49 3.835,7.65 L4.3
SSRX1H_P: L4.1 X1.B11 | length 3.6
  Bottom Side w0.23: X1.B11@1,7.75 1.865,7.75 1.925,7.81 2.415,7.81 3.115,7.11 3.675,7.11 3.835,6.95 L4.1
SSRX2D_N: D1.1 D1.6 L2.4 X2.A10 | length 27.9
  Top Side w0.23: L2.4 5.415,12.35 5.575,12.51 27.5,12.51 27.51,12.5 D1.6 D1.1 29.29,12.5 29.3,12.51 30.543,12.51 31.243,11.81 32.03,11.81 32.09,11.75 X2.A10
SSRX2D_P: D1.2 D1.5 L2.2 X2.A11 | length 27.9
  Top Side w0.23: L2.2 5.415,13.05 5.575,12.89 27.5,12.89 27.51,12.9 D1.5 D1.2 29.29,12.9 29.3,12.89 30.7,12.89 31.4,12.19 32.03,12.19 32.09,12.25 X2.A11
SSRX2H_N: L2.3 X1.A10 | length 3.6
  Top Side w0.23: X1.A10@1,11.75 1.865,11.75 1.925,11.81 2.585,11.81 3.285,12.51 3.675,12.51 3.835,12.35 L2.3
SSRX2H_P: L2.1 X1.A11 | length 3.6
  Top Side w0.23: X1.A11@1,12.25 1.865,12.25 1.925,12.19 2.428,12.19 3.128,12.89 3.675,12.89 3.835,13.05 L2.1
SSTX1D_N: D2.1 D2.6 L3.2 X2.A3 | length 27.9
  Top Side w0.23: L3.2 5.415,7.65 5.575,7.49 27.5,7.49 27.51,7.5 D2.1 D2.6 29.29,7.5 29.3,7.49 30.54,7.49 31.24,8.19 32.03,8.19 32.09,8.25 X2.A3
SSTX1D_P: D2.2 D2.5 L3.4 X2.A2 | length 27.9
  Top Side w0.23: L3.4 5.415,6.95 5.575,7.11 27.5,7.11 27.51,7.1 D2.2 D2.5 29.29,7.1 29.3,7.11 30.697,7.11 31.397,7.81 32.03,7.81 32.09,7.75 X2.A2
SSTX1H_N: L3.1 X1.A3 | length 3.6
  Top Side w0.23: X1.A3@1,8.25 1.865,8.25 1.925,8.19 2.572,8.19 3.272,7.49 3.675,7.49 3.835,7.65 L3.1
SSTX1H_P: L3.3 X1.A2 | length 3.6
  Top Side w0.23: X1.A2@1,7.75 1.865,7.75 1.925,7.81 2.415,7.81 3.115,7.11 3.675,7.11 3.835,6.95 L3.3
SSTX2D_N: D4.1 D4.6 L5.2 X2.B3 | length 31.1
  Bottom Side w0.23: L5.2 5.415,12.35 5.575,12.51 27.5,12.51 27.51,12.5 D4.1 D4.6 29.29,12.5 29.3,12.51 29.822,12.51 31.037,13.725 31.6,13.725 32.12,13.205 32.12,12.568 32.878,11.81 34.15,11.81 X2.B3@34.36,11.6
SSTX2D_P: D4.2 D4.5 L5.4 X2.B2 | length 31.1
  Bottom Side w0.23: L5.4 5.415,13.05 5.575,12.89 27.5,12.89 27.51,12.9 D4.2 D4.5 29.29,12.9 29.3,12.89 29.665,12.89 30.88,14.105 31.757,14.105 32.5,13.362 32.5,12.725 33.035,12.19 34.15,12.19 X2.B2@34.36,12.4
SSTX2H_N: L5.1 X1.B3 | length 3.6
  Bottom Side w0.23: X1.B3@1,11.75 1.865,11.75 1.925,11.81 2.585,11.81 3.285,12.51 3.675,12.51 3.835,12.35 L5.1
SSTX2H_P: L5.3 X1.B2 | length 3.6
  Bottom Side w0.23: X1.B2@1,12.25 1.865,12.25 1.925,12.19 2.428,12.19 3.128,12.89 3.675,12.89 3.835,13.05 L5.3
VCC_D: D6.1 L8.2 L11.2 X2.A4 X2.A9 X2.B4 X2.B9 | length 2.4
  Top Side w0.3: X2.A4@32.4,8.75 X2.A4 33.615,8.75 X2.B9 ; X2.A9 33.615,11.25 X2.B4
  other v1: 25.5,1.75 26.125,1.75 26.75,1.75 27.375,1.75 30.375,3.1 30.375,3.75 31.025,3.75 30.375,4.4 31.025,4.4 31.025,5.05 25.5,5.25 26.125,5.25 26.75,5.25 27.375,5.25
VCC_H: L6.1 L9.1 X1.A4 X1.A9 X1.B4 X1.B9 | length 7.1
  Top Side w0.3: X1.A4@1,8.75 v1(2.125,8.75) v1(2.775,8.75) ; X1.A9@1,11.25 v1(2.125,11.25) v1(2.775,11.25)
  Bottom Side w0.3: X1.B9@1,8.75 v1(2.125,8.75) v1(2.775,8.75) ; X1.B4@1,11.25 v1(2.125,11.25) v1(2.775,11.25)
  other v1: 1.75,2.375 1.75,3.125 1.75,3.875 2.125,4.75 2.875,5.25 3.5,5.25 4.125,5.25 4.75,5.25
pads on no net: D5.6 D5.9 X2.M1 X2.M2

## Polygon pours and split planes (outlines as drawn)
GND on Top Side "Top Side-No Net" (solid, remove dead copper, pour order 16): 0,12.575 2.05,12.575 2.25,12.775 2.25,14.25 2.5,14.5 31.125,14.5 33.125,12.5 33.125,6.95 31.875,5.7 31.875,3.254 30.877,2.256 28.731,2.256 27.981,1.506 2.253,1.506 1.503,2.256 1.503,4.506 2.25,5.253 2.25,7.2 2.025,7.425 0.003,7.425 0.003,0.006 39.603,0.006 39.603,20.006 0,20.006
VCC_D on Top Side "Top Side-No Net" (solid, pour order 0): 25.238,5.5 27.5,5.5 28.875,4.125 29.663,4.125 29.863,4.325 29.863,4.513 30.775,5.425 31.275,5.425 31.425,5.275 31.425,3.563 30.613,2.75 28.375,2.75 28.125,2.5 28.125,1.887 27.738,1.5 25.238,1.5 25.113,1.625 25.113,5.375
NetC2_1 on Top Side "Top Side-No Net" (solid, pour order 2): 15.375,5.5 22.125,5.5 22.125,1.5 15.375,1.5
VCC_H on Top Side "Top Side-No Net" (solid, pour order 6): 5.125,1.625 2.125,1.625 1.5,2.25 1.5,4.5 2.25,5.25 2.5,5.5 5.125,5.5
NetC1_1 on Top Side "Top Side-No Net" (solid, pour order 4): 14.625,5.5 14.625,1.5 7.875,1.5 7.875,5.5
VCC_H on Bottom Side "Top Side-No Net" (solid, pour order 8): 5.125,5.5 5.125,1.625 2.125,1.625 1.5,2.25 1.5,4.5 2.25,5.25 2.5,5.5
NetC2_1 on Bottom Side "Top Side-No Net" (solid, pour order 12): 15.375,5.5 22.125,5.5 22.125,1.5 15.375,1.5
VCC_D on Bottom Side "Top Side-No Net" (solid, pour order 14): 27.5,5.5 28.875,4.125 29.625,4.125 29.875,4.375 29.875,4.525 30.775,5.425 31.275,5.425 31.425,5.275 31.425,3.56 30.615,2.75 28.375,2.75 28.125,2.5 28.125,1.888 27.738,1.5 25.25,1.5 25.125,1.625 25.125,5.375 25.25,5.5
NetC1_1 on Bottom Side "Top Side-No Net" (solid, pour order 10): 7.875,5.5 14.625,5.5 14.625,1.5 7.875,1.5
GND on Bottom Side "Top Side-No Net" (solid, remove dead copper, pour order 18): -0.012,7.425 2.025,7.425 2.25,7.2 2.25,5.262 1.488,4.5 1.488,2.25 2.113,1.625 28.087,1.625 28.713,2.25 30.875,2.25 31.875,3.25 31.875,5.15 33.125,6.4 33.125,13.625 32.125,14.625 30.5,14.625 30.375,14.5 2.5,14.5 2.25,14.25 2.25,12.775 2.05,12.575 0,12.575 0,20 39.588,20 39.588,0 -0.012,0
GND on Ref Ground TS (split plane): 164 vertices, not listed, extent 0.301,0.301 39.299,19.699
VCC_H on Ref Ground TS (split plane): 3.023,11.333 3.023,11.042 2.708,10.727 1.825,10.727 1.786,10.719 1.753,10.697 1.731,10.664 1.723,10.625 1.723,9.375 1.731,9.336 1.753,9.303 1.786,9.281 1.825,9.273 2.708,9.273 3.023,8.958 3.023,8.636 2.864,8.477 1.775,8.477 1.736,8.469 1.703,8.447 1.681,8.414 1.673,8.375 1.673,7.1 1.681,7.061 1.703,7.028 3.053,5.678 3.086,5.656 3.125,5.648 5.123,5.648 5.123,1.727 0.303,1.727 0.306,5.749 0.45,5.749 0.465,5.75 0.48,5.75 0.516,5.754 0.6,5.754 0.659,5.759 0.715,5.776 0.767,5.804 0.813,5.842 0.851,5.888 0.878,5.94 0.887,5.967 0.909,5.994 0.933,6.039 0.936,6.046 0.974,6.136 0.978,6.15 0.984,6.164 0.987,6.178 0.991,6.192 0.992,6.207 0.995,6.222 1,6.27 1,6.285 1.001,6.3 1.001,6.675 1,6.69 1,6.705 0.995,6.753 0.992,6.768 0.991,6.783 0.987,6.797 0.984,6.811 0.978,6.825 0.974,6.839 0.936,6.929 0.933,6.936 0.909,6.981 0.889,7.005 0.878,7.04 0.851,7.092 0.813,7.138 0.767,7.176 0.715,7.204 0.659,7.221 0.6,7.226 0.301,7.226 0.301,11.523 2.833,11.523
VCC_D on Ref Ground TS (split plane): 33.998,11.308 33.998,8.292 33.155,7.449 33.133,7.416 33.125,7.377 33.125,7.044 31.553,5.472 31.531,5.439 31.523,5.4 31.523,3.617 30.633,2.727 30.042,2.727 29.777,2.992 29.777,4.1 29.777,4.756 32.697,7.676 32.719,7.709 32.727,7.748 32.727,10.025 32.727,10.958 33.292,11.523 33.783,11.523
GND on Ref Ground BS (split plane): 163 vertices, not listed, extent 0.301,0.301 39.299,19.699
VCC_H on Ref Ground BS (split plane): 3.023,11.333 3.023,11.042 2.708,10.727 1.825,10.727 1.786,10.719 1.753,10.697 1.731,10.664 1.723,10.625 1.723,9.375 1.731,9.336 1.753,9.303 1.786,9.281 1.825,9.273 2.708,9.273 3.023,8.958 3.023,8.642 2.858,8.477 1.775,8.477 1.736,8.469 1.703,8.447 1.681,8.414 1.673,8.375 1.673,7.1 1.681,7.061 1.703,7.028 3.053,5.678 3.086,5.656 3.125,5.648 5.123,5.648 5.123,1.727 0.303,1.727 0.306,5.749 0.45,5.749 0.465,5.75 0.48,5.75 0.516,5.754 0.6,5.754 0.659,5.759 0.715,5.776 0.767,5.804 0.813,5.842 0.851,5.888 0.878,5.94 0.887,5.967 0.909,5.994 0.933,6.039 0.936,6.046 0.974,6.136 0.978,6.15 0.984,6.164 0.987,6.178 0.991,6.192 0.992,6.207 0.995,6.222 1,6.27 1,6.285 1.001,6.3 1.001,6.675 1,6.69 1,6.705 0.995,6.753 0.992,6.768 0.991,6.783 0.987,6.797 0.984,6.811 0.978,6.825 0.974,6.839 0.936,6.929 0.933,6.936 0.909,6.981 0.889,7.005 0.878,7.04 0.851,7.092 0.813,7.138 0.767,7.176 0.715,7.204 0.659,7.221 0.6,7.226 0.301,7.226 0.301,11.523 2.833,11.523
VCC_D on Ref Ground BS (split plane): 33.998,11.306 33.998,8.292 33.153,7.447 33.131,7.414 33.123,7.375 33.123,7.042 31.553,5.472 31.531,5.439 31.523,5.4 31.523,3.617 30.633,2.727 30.042,2.727 29.777,2.992 29.777,4.756 32.697,7.676 32.719,7.709 32.727,7.748 32.727,10.958 33.292,11.523 33.781,11.523

## Keep-outs
Keep-Out Layer:
  lines w0.1: 30.65,17.1 37,17.1 37,18.6 30.65,18.6 30.65,17.1

## Other copper
Top Side:
  text "WE 2019" at 1.575,17.45 h0.8
  text "TL" at 31.05,17.45 h0.8
  text ".VariantName" at 0,-13.5 h1.5
Bottom Side:
  text "1100R3 USB 3.1 type C filter" at 22.375,17.45 h0.8
  text "BL" at 36.55,17.45 h0.8
  text ".VariantName" at 54,-16 h1.5
Ref Ground TS (plane layer: these items are gaps in the copper):
  lines w0.2: 0,1.625 5.225,1.625 5.225,5.75 3.125,5.75 1.775,7.1 1.775,8.375 2.9,8.375 2.9,8.369 3.125,8.594 3.125,9 2.75,9.375 1.825,9.375 1.825,10.625 2.75,10.625 3.125,11 3.125,11.375 2.875,11.625 0,11.625 ; 29.675,2.95 29.675,4.1 29.675,4.798 32.625,7.748 32.625,10.025 32.625,11 33.25,11.625 33.825,11.625 34.1,11.35 34.1,8.25 33.227,7.377 33.227,7.002 31.625,5.4 31.625,3.575 30.675,2.625 30,2.625 29.675,2.95
  text "I1" at 32.65,17.45 h0.8
Ref Ground BS (plane layer: these items are gaps in the copper):
  lines w0.2: 0,1.625 5.225,1.625 5.225,5.75 3.125,5.75 1.775,7.1 1.775,8.375 2.9,8.375 3.125,8.6 3.125,9 2.75,9.375 1.825,9.375 1.825,10.625 2.75,10.625 3.125,11 3.125,11.375 2.875,11.625 0,11.625 ; 29.675,2.95 30,2.625 30.675,2.625 31.625,3.575 31.625,5.4 33.225,7 33.225,7.375 34.1,8.25 34.1,11.348 33.823,11.625 33.25,11.625 32.625,11 32.625,7.748 29.675,4.798 29.675,2.95
  text "I2" at 33.75,17.45 h0.8

## Silkscreen, mask and mechanical layers (free items; w line width, h text height)
Top Overlay:
  circle w0.2: c19.45,16.123 r0.378
  circle w0.2: c20.8,15.188 r0.378
  circle w0.2: c20.8,17.067 r0.378
  circle w0.2: c19.45,17.992 r0.378
  circle w0.2: c20.8,18.867 r0.378
  lines w0.2: 9.77,15.188 20.417,15.188 ; 9.77,16.123 10.725,16.119 ; 9.77,17.055 10.65,17.05 ; 9.77,17.982 10.625,17.982 ; 9.77,18.875 20.417,18.875 ; 10.99,18.143 11.81,18.142 ; 10.99,18.318 11.81,18.317 ; 11.015,17.793 11.835,17.792 ; 11.015,17.968 11.835,17.967 ; 11.04,17.443 11.86,17.442 ; 11.04,17.618 11.86,17.617 ; 11.065,17.093 11.885,17.092 ; 11.065,17.268 11.885,17.267 ; 11.09,16.77 14,16.767 ; 11.115,16.245 13.694,16.243 ; 11.115,16.42 13.7,16.418 ; 11.115,16.595 13.825,16.593 ; 11.14,16.943 14.087,16.94 ; 11.215,16.07 13.519,16.068 ; 11.24,15.915 12.175,15.914 ; 11.265,15.743 12.2,15.742 ; 11.99,17.118 13.185,17.117 14.085,17.116 ; 12.14,17.293 13.075,17.292 ; 12.44,15.768 13.375,15.767 ; 12.44,15.915 13.375,15.914 ; 13.375,17.242 14.195,17.242 ; 13.525,17.417 14.345,17.417 ; 13.625,17.592 14.445,17.592 ; 13.75,17.767 14.57,17.767 ; 13.8,17.954 14.62,17.954 ; 13.912,18.142 14.732,18.142 ; 13.962,15.743 15.962,15.742 ; 13.987,15.843 15.987,15.842 ; 14.027,18.317 14.847,18.317 ; 14.087,15.993 16.087,15.992 ; 14.227,16.143 14.927,16.143 ; 14.277,16.318 14.977,16.318 ; 14.352,16.493 15.052,16.493 ; 14.427,16.674 15.127,16.674 ; 14.562,16.843 16.562,16.842 ; 14.662,16.943 16.762,16.942 ; 14.737,17.118 16.837,17.117 ; 14.812,17.293 16.912,17.292 ; 14.977,17.443 15.677,17.442 ; 15.002,17.543 15.702,17.543 ; 15.077,17.693 15.777,17.693 ; 15.177,17.868 15.877,17.868 ; 15.212,18.018 17.41,18.017 ; 15.287,18.143 17.485,18.142 ; 15.387,18.318 17.585,18.317 ; 16.905,16.119 19.068,16.119 ; 17.463,17.05 20.418,17.05 ; 18.004,17.982 19.065,17.982 ; 19.826,16.119 21.77,16.119 ; 19.826,17.982 21.77,17.982 ; 21.178,15.188 21.77,15.188 ; 21.178,17.05 21.77,17.05 ; 21.178,18.875 21.77,18.875 ; 10.965,18.493 11.138,15.592 12.082,15.592 12.303,15.914 12.355,15.591 13.329,15.593 15.021,18.492 14.121,18.492 13.212,16.969 13.118,17.478 12.251,17.476 11.894,16.997 11.81,18.492 10.965,18.493 ; 13.801,15.592 15.487,18.493 17.685,18.492 17.32,17.87 15.918,17.876 15.676,17.478 17.081,17.478 16.605,16.674 15.203,16.674 14.899,16.166 16.314,16.166 15.97,15.593 13.801,15.592
  text "WÜRTH ELEKTRONIK" at 13.7,13.617 h1.2
Outline:
  the board outline again, w0.1

## Dimensions
0,0 to 39.6,0 on Dimension 2
39.6,0 to 39.6,20 on Dimension 2

## Text inside footprints (layer, text, board x,y; h text height)
X2: Dimension 1 "PCB End" at 40.515,8.15 h1.02 r90; Mechanical 8 "Milling Area" at 37.465,7.8 h1.02 r90